# Altium PCB 解调板PCB.PcbDoc
Units mil, origin at the board's own origin, x right, y up, seen from the top; angles counter-clockwise.
Board outline 6000 x 4000 mil, 2 copper layers (Top Layer, Bottom Layer); 51 components, 40 nets, 150 pads, 1 vias.
Unrouted connection lines stored in the file: 1.
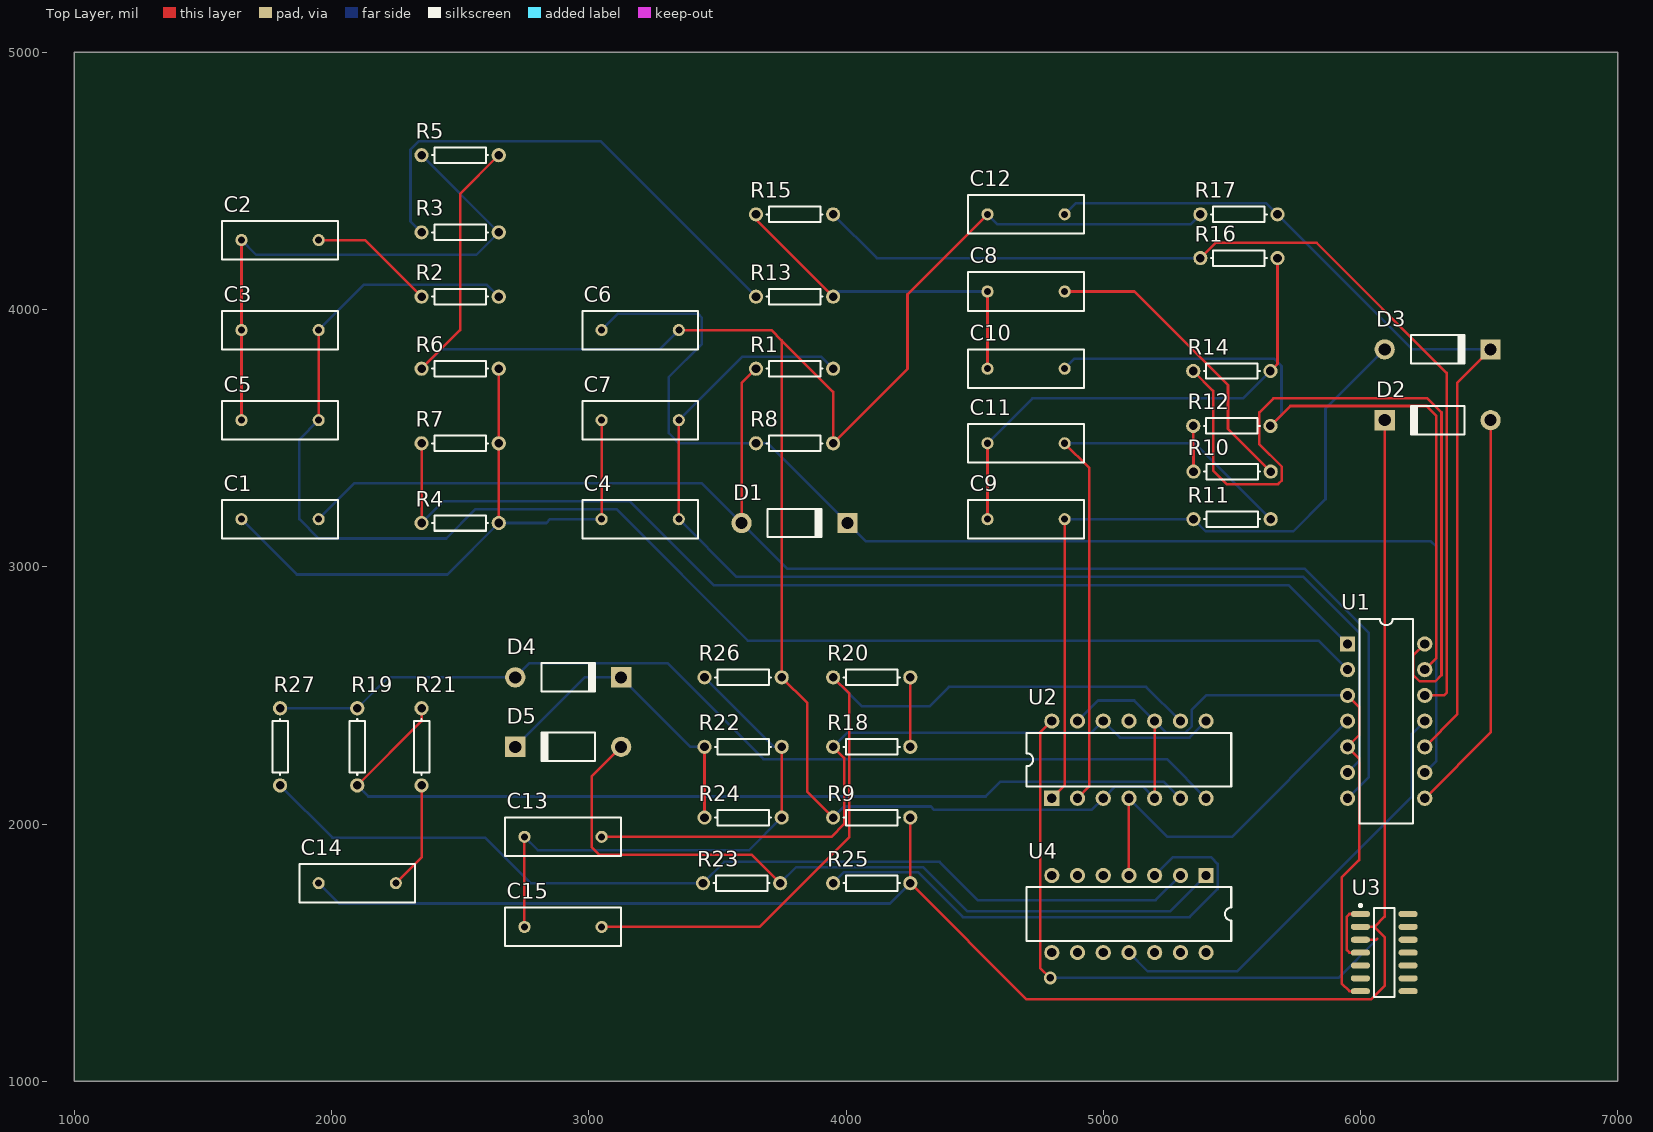
[diagram p0: Top Layer view]
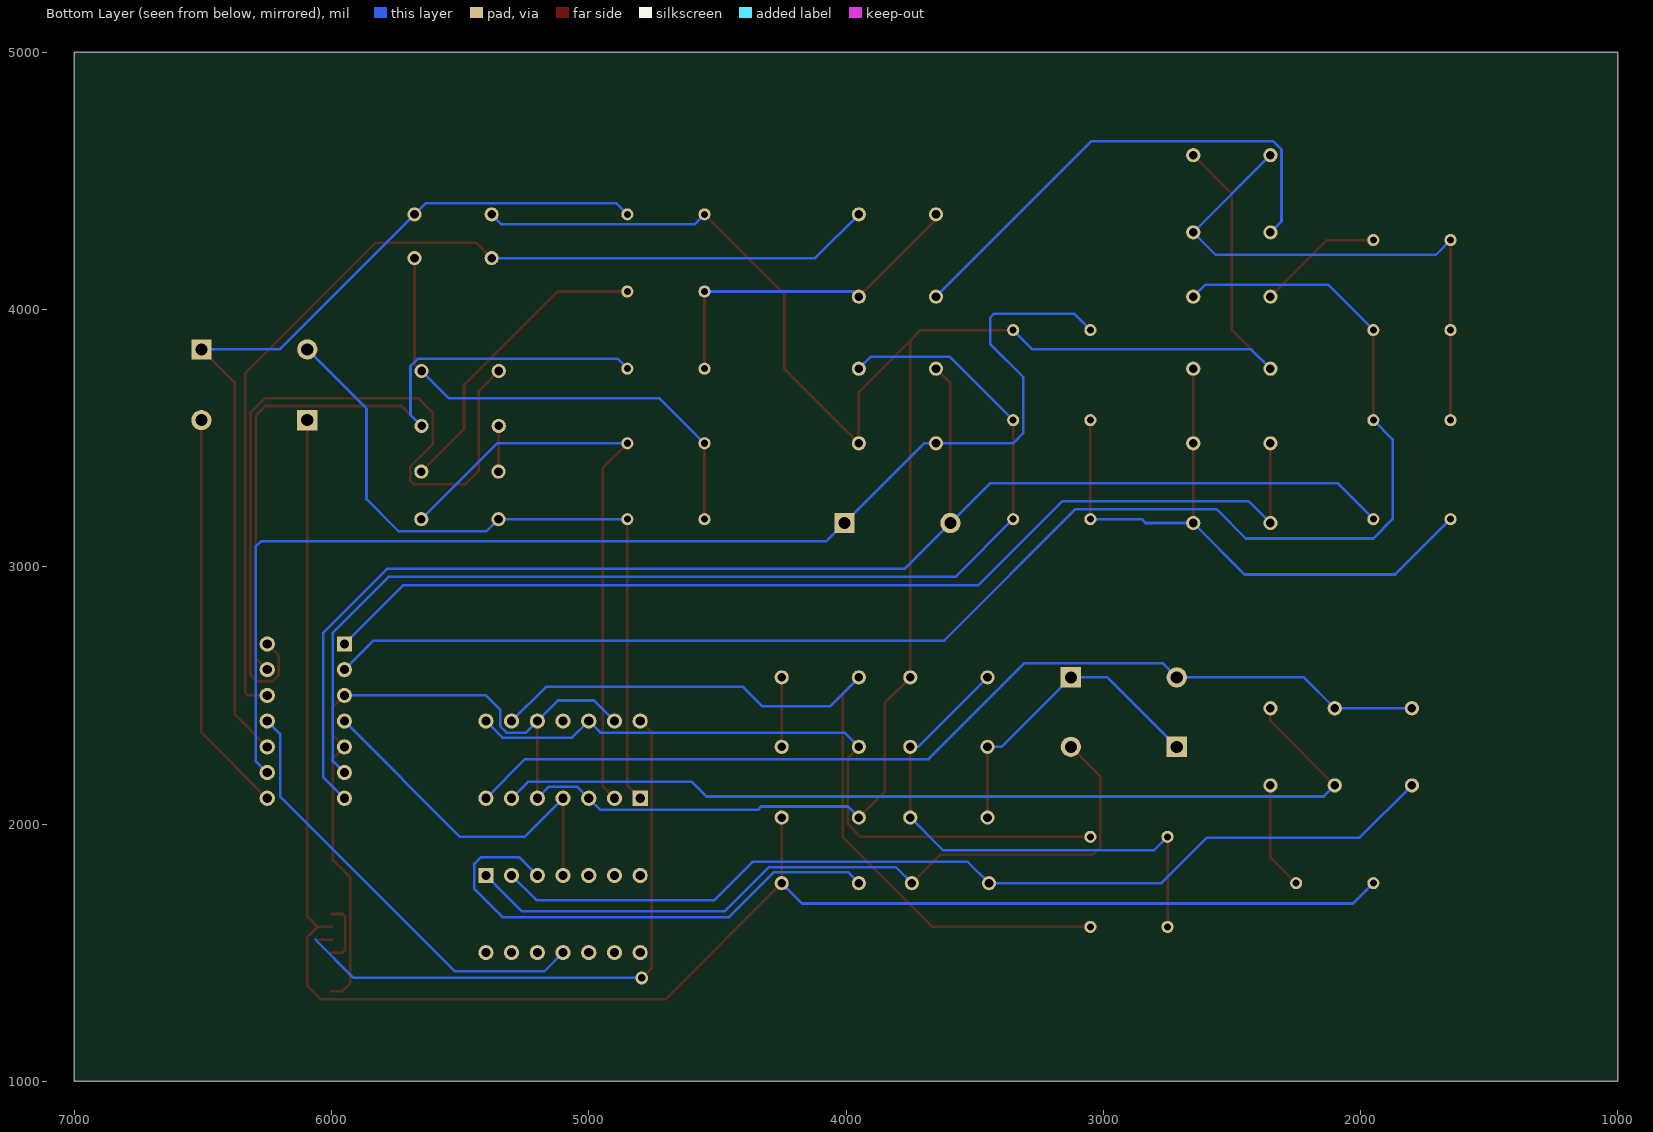
[diagram p1: Bottom Layer view, seen from below]

## Layer stack, top to bottom
Top Solder: solder mask 0.4, Solder Resist, Dk 3.5
Top Layer: signal copper 1.4
Dielectric 1: dielectric 12.6, FR-4, Dk 4.8
Bottom Layer: signal copper 1.4
Bottom Solder: solder mask 0.4, Solder Resist, Dk 3.5

## Board outline
1000,1000 7000,1000 7000,5000 1000,5000

## Design rules (kind name [scope] priority, off if disabled: settings)
Clearance [All] p1: gap=10 ignorepadtopadclearanceinfootprint=FALSE except(0: Arc-Hole Track-Hole SMDPad-Hole THPad-Hole Via-Hole Fill-Hole Poly-Hole Region-Hole Text-Hole)
PolygonConnect [All] p1: connectstyle=Relief reliefconductorwidth=10 reliefentries=4 polygonreliefangle="90 Angle" airgapwidth=10
RoomDefinition 解调板原理图 [InComponentClass('解调板原理图')] p1: confinementstyle=ConfineIn formatcopy=TRUE outline 7000,770 1050,770 1050,5070 7000,5070
RoutingVias [All] p1: holewidth=28 width=50 viastyle="Through Hole" minholewidth=28 minwidth=50 maxholewidth=28 maxwidth=50
SolderMaskExpansion [All] p1: expansion=4
Width [All] p1: maxlimit=10 minlimit=10 preferedwidth=10
30 further rules are at their usual default settings.

## Components (designator, comment, footprint, x,y, rotation, side; value= is the part's Value field where it differs from the comment)
C1 "Cap" RAD-0.3 1800,3185 r0 top value=150pF
C2 "Cap" RAD-0.3 1800,4270 r0 top value=150pF
C3 "Cap" RAD-0.3 1800,3920 r0 top value=100pF
C4 "Cap" RAD-0.3 3200,3185 r0 top value=100pF
C5 "Cap" RAD-0.3 1800,3570 r0 top value=20pF
C6 "Cap" RAD-0.3 3200,3920 r180 top value=10nF
C7 "Cap" RAD-0.3 3200,3570 r0 top value=20pF
C8 "Cap" RAD-0.3 4700,4070 r0 top value=100pF
C9 "Cap" RAD-0.3 4700,3185 r0 top value=100pF
C10 "Cap" RAD-0.3 4700,3770 r0 top value=100pF
C11 "Cap" RAD-0.3 4700,3480 r0 top value=100pF
C12 "Cap" RAD-0.3 4700,4370 r0 top value=10nF
C13 "Cap" RAD-0.3 2900,1950 r0 top value=150pF
C14 "Cap" RAD-0.3 2100,1770 r0 top value=10nF
C15 "Cap" RAD-0.3 2900,1600 r0 top value=100pF
D1 "Diode 1N4001" DO-41 3800,3170 r0 top
D2 "Diode 1N4001" DO-41 6300,3570 r180 top
D3 "Diode 1N4001" DO-41 6300,3845 r0 top
D4 "Diode 1N4001" DO-41 2920,2570 r0 top
D5 "Diode 1N4001" DO-41 2920,2300 r180 top
R1 "Res1" AXIAL-0.3 3800,3770 r180 top value=82K
R2 "Res1" AXIAL-0.3 2500,4050 r180 top value=120K
R3 "Res1" AXIAL-0.3 2500,4300 r0 top value=12K
R4 "Res1" AXIAL-0.3 2500,3170 r0 top value=100K
R5 "Res1" AXIAL-0.3 2500,4600 r180 top value=5.1K
R6 "Res1" AXIAL-0.3 2500,3770 r0 top value=3K
R7 "Res1" AXIAL-0.3 2500,3480 r0 top value=100K
R8 "Res1" AXIAL-0.3 3800,3480 r180 top value=1K
R9 "Res1" AXIAL-0.3 4100,2025 r0 top value=10K
R10 "Res1" AXIAL-0.3 5501,3370 r0 top value=100K
R11 "Res1" AXIAL-0.3 5501,3185 r180 top value=91K
R12 "Res1" AXIAL-0.3 5500,3547.52 r180 top value=15K
R13 "Res1" AXIAL-0.3 3800,4050 r0 top value=15K
R14 "Res1" AXIAL-0.3 5500,3761 r0 top value=47K
R15 "Res1" AXIAL-0.3 3800,4370 r180 top value=1.5K
R16 "Res1" AXIAL-0.3 5527.52,4200 r0 top value=1K
R17 "Res1" AXIAL-0.3 5527.52,4370 r0 top value=1K
R18 "Res1" AXIAL-0.3 4100,2300 r180 top value=180k
R19 "Res1" AXIAL-0.3 2100,2300 r90 top value=10K
R20 "Res1" AXIAL-0.3 4100,2570 r0 top value=180k
R21 "Res1" AXIAL-0.3 2350,2300 r90 top value=500
R22 "Res1" AXIAL-0.3 3600,2300 r0 top value=150k
R23 "Res1" AXIAL-0.3 3594.09,1770 r0 top value=10K
R24 "Res1" AXIAL-0.3 3600,2025 r0 top value=150k
R25 "Res1" AXIAL-0.3 4100,1770 r0 top value=500
R26 "Res1" AXIAL-0.3 3600,2570 r180 top value=220k
R27 "Res1" AXIAL-0.3 1800,2300 r270 top value=10K
U1 "TL084CN" DIP14 6100,2400 r270 top
U2 "TL084CN" DIP14 5100,2250 r0 top
U3 "SN74LS74AD" D014_L 6092.52,1500 r0 top
U4 "TL084CN" DIP14 5100,1650 r180 top

## Footprints (in the part's own frame and the unit in brackets; to place one, negate y for a bottom-side part, rotate by r counter-clockwise, add the part's x,y. Pads: shape width x height; smd on the part's side, far side on the other; paste and mask are expansions set on the pad)
AXIAL-0.3 [mm] "Axial Device, Thru-Hole; 2 Leads; 0.3 in Pin Spacing"
  round 1.4 hole 0.85: 1(-3.81,0) 2(3.81,0)
  silkscreen extent -2.77,-0.76 2.77,0.76
D014_L [mm] "SOIC, 14-Leads, Body 8.7x3.9mm, Pitch 1.27mm, IPC High Density"
  oval 1.9x0.6 smd: 1(-2.35,3.81) 2(-2.35,2.54) 3(-2.35,1.27) 4(-2.35,0) 5(-2.35,-1.27) 6(-2.35,-2.54) 7(-2.35,-3.81) 8(2.35,-3.81) 9(2.35,-2.54) 10(2.35,-1.27) 11(2.35,0) 12(2.35,1.27) 13(2.35,2.54) 14(2.35,3.81)
  silkscreen extent -2.47,-4.4 1,4.78, body extent -1.95,-4.33 1.95,4.33, height 1.75
DIP14 [mm] "DIP; 14 Leads; Row Spacing 7.62 mm; Pitch 2.54 mm"
  rect 1.5x1.5 hole 0.9: 1(-7.62,-3.81)
  round 1.5 hole 0.9: 2(-5.08,-3.81) 3(-2.54,-3.81) 4(0,-3.81) 5(2.54,-3.81) 6(5.08,-3.81) 7(7.62,-3.81) 8(7.62,3.81) 9(5.08,3.81) 10(2.54,3.81) 11(0,3.81) 12(-2.54,3.81) 13(-5.08,3.81) 14(-7.62,3.81)
  silkscreen extent -10.1,-2.65 10.1,2.65
DO-41 [mm] "Diode, Axial; Body 5.2 x 2.7 mm (LxDia. max), Lead Dia. 0.86 mm (max)"
  round 2 hole 1.2: 1(-5.23,0)
  rect 2x2 hole 1.2: 2(5.23,0)
  silkscreen extent -2.65,-1.4 2.75,1.4
RAD-0.3 [mm] "Radial Cap, Thru-Hole; 2 Leads; 0.3 in Pin Spacing"
  round 1.2 hole 0.7: 1(-3.81,0) 2(3.81,0)
  silkscreen extent -5.71,-1.91 5.71,1.91

## Part data
C1 C2 C3 C4 C5 C6 C7 C8 C9 C10 C11 C12 C13 C14 C15: "Capacitor", LatestRevisionDate=17-Jul-2002, LatestRevisionNote="Re-released for DXP Platform.", PackageDescription="Radial Cap, Thru-Hole; 2 Leads; 0.3 in Pin Spacing", PackageReference=RAD-0.3, Published=8-Jun-2000, Publisher="Altium Limited"
D1 D2 D3 D4 D5: "1 Amp General Purpose Rectifier", Code_JEDEC=DO-204-AL, ComponentLink1Description="Manufacturer Link", ComponentLink1URL=http://www.fairchildsemi.com/, ComponentLink2Description=Datasheet, ComponentLink2URL=http://www.fairchildsemi.com/ds/1N%2F1N4001.pdf, DatasheetVersion=1998, LatestRevisionDate=17-Jul-2002, LatestRevisionNote="Re-released for DXP Platform.", PackageDescription="Diode, Axial; Body 5.2 x 2.7 mm (LxDia. max), Lead Dia. 0.86 mm (max)", PackageReference=DO-41, PackageVersion=Aug-1999, Published=8-Jun-2000, Publisher="Altium Limited"
R1 R2 R3 R4 R5 R6 R7 R8 R9 R10 R11 R12 R13 R14 R15 R16 R17 R18 R19 R20 R21 R22 R23 R24 R25 R26 R27: "Resistor", LatestRevisionDate=17-Jul-2002, LatestRevisionNote="Re-released for DXP Platform.", PackageDescription="Axial Device, Thru-Hole; 2 Leads; 0.3 in Pin Spacing", PackageReference=AXIAL-0.3, Published=8-Jun-2000, Publisher="Altium Limited"
U1 U2 U4: "General-Purpose J-FET Quad Operational Amplifier", ComponentLink1Description="Manufacturer Link", ComponentLink1URL=http://www.st.com/, ComponentLink2Description=Datasheet, ComponentLink2URL=http://www.st.com/stonline/products/literature/ds/2301/tl084.pdf, DatasheetVersion=Jan-1999, LatestRevisionDate=06-Jun-2005, LatestRevisionNote="Stylized 3D Model Added.", PackageDescription="DIP; 14 Leads; Row Spacing 7.62 mm; Pitch 2.54 mm", PackageReference=DIP14, PackageVersion=Jan-1997, Published=24-Aug-2001, Publisher="Altium Limited"
U3: "Dual D-Type Positive-Edge-Triggered Flip-Flop with Preset and Clear", Code_IPC=SOIC127P600-14, ComponentLink1Description="Manufacturer Link", ComponentLink1URL=http://www.ti.com/, ComponentLink2Description=Datasheet, ComponentLink2URL=http://www-s.ti.com/sc/ds/sn74ls74a.pdf, DatasheetVersion=Mar-1988, LatestRevisionDate=13-Apr-2006, LatestRevisionNote="IPC-7351 Footprint Added.", PackageDescription="14-Pin Small Outline Integrated Circuit 1.27 mm Pitch", PackageReference=D014, PackageVersion=Jan-1998, Published=8-Jun-2000, Publisher="Altium Limited"

## Via types
v1: diameter 50, hole 28, Top Layer to Bottom Layer, 1 vias

## Nets (pads, with @x,y where several pads share a name; then routed paths per layer and width w, separated by ;. In a path a pad name is that pad's centre, name@x,y a point inside that pad or via, vN(x,y) a via of type N, cw(c..) or ccw(c..) an arc to the next point about the centre after c; other vN are vias at no path point)
5: U3.1 U3.4 | length 244.3
  Top Layer w10: U3.4 5957,1500 5947,1510 5947,1640 5957,1650 U3.1
12: U2.11
+12: U1.11 U4.11 | length 1725.6
  Bottom Layer w10: U4.11 5173,1427 5520,1427 6200,2107 6200,2350 U1.11
-12: U1.4 U2.4 U4.4 | length 1398.5
  Top Layer w10: U4.4 U2.4
  Bottom Layer w10: U2.4 5250,1950 5500,1950 U1.4
GND: C6.1 C12.1 R5.1 R6.1 R8.1 R9.1 R17.1 R26.1 U1.3 U1.5 U2.3 U2.5 U2.10 U2.13 U3.7 | length 11003
  Top Layer w10: R6.1 2500,3920 2500,4450 R5.1 ; C6.1 3710,3920 3750,3880 ; R9.1 3850,2125 3850,2470 R26.1 3750,3880 ; C12.1 4239,4059 4239,3769 R8.1 3950,3680 3750,3880 ; U2.5 U2.10 ; U1.3 5995,2455 5995,2345 U1.5 5995,2255 5995,1860 5927,1792 5927,1380 5957,1350 U3.7
  Bottom Layer w10: R6.1 2425,3845 3275,3845 C6.1 ; R9.1 3993,2068 4330,2068 4343,2055 4955,2055 U2.3 5045,2145 5155,2145 U2.5 ; C12.1 4589,4331 5338.52,4331 R17.1 ; U2.13 4980,2480 5120,2480 U2.10 5244.53,2355.47 5320,2355.47 5344.53,2380 5344.53,2444.53 5400,2500 U1.3
NetC1_1: C1.1 C4.1 C7.1 R4.2 R6.2 R7.2 | length 2563.1
  Top Layer w10: R4.2 R7.2 R6.2 ; C4.1 C7.1
  Bottom Layer w10: C1.1 1865,2970 2450,2970 R4.2 2835,3170 2850,3185 C4.1
NetC1_2: C1.2 D1.1 R1.2 U1.7 | length 5682.7
  Top Layer w10: D1.1 3594.09,3714.09 R1.2
  Bottom Layer w10: C1.2 2090,3325 3439.09,3325 D1.1 3771.09,2993 5783.12,2993 6033,2743.12 6033,2183 U1.7
NetC2_1: C2.1 C3.1 C5.1 R3.2 R5.2 | length 2183.9
  Top Layer w10: C5.1 C3.1 C2.1
  Bottom Layer w10: C2.1 1707,4213 2563,4213 R3.2 R5.2
NetC2_2: C2.2 R2.2 | length 491.1
  Top Layer w10: C2.2 2130,4270 R2.2
NetC3_2: C3.2 C5.2 R2.1 U1.2 | length 5970.6
  Top Layer w10: C5.2 C3.2
  Bottom Layer w10: C5.2 1875,3495 1875,3185 1950,3110 2446,3110 2560,3224 3107,3224 3618,2713 5837,2713 U1.2 ; C3.2 2127,4097 2603,4097 R2.1
NetC4_2: C4.2 C7.2 R1.1 U1.6 | length 4497.1
  Top Layer w10: C4.2 C7.2
  Bottom Layer w10: C4.2 3574,2961 5778.06,2961 5995,2744.06 5995,2245 U1.6 ; C7.2 3597,3817 3903,3817 R1.1
NetC6_2: C6.2 D1.2 R8.2 U1.9 | length 4988.3
  Bottom Layer w10: C6.2 3114,3984 3424,3984 3440,3968 3440,3866 3311,3737 3311,3520 3351,3480 R8.2 3695.91,3480 D1.2 4076.91,3099 6274,3099 6295,3078 6295,2245 U1.9
NetC8_1: C8.1 C10.1 R13.2 R15.2 | length 1352.5
  Top Layer w10: R15.2 3650,4350 R13.2 ; C10.1 C8.1
  Bottom Layer w10: R13.2 3970,4070 C8.1
NetC8_2: C8.2 R10.2 | length 1190.5
  Top Layer w10: C8.2 5121,4070 5485,3706 5485,3536 R10.2
NetC9_1: C9.1 C11.1 R14.2 R16.2 | length 1961.8
  Top Layer w10: C9.1 C11.1 ; R14.2 5677.52,3788.52 R16.2
  Bottom Layer w10: C11.1 4725,3655 5544,3655 R14.2
NetC9_2: C9.2 D3.1 R11.2 U2.1 | length 2868.3
  Top Layer w10: U2.1 4850,2150 C9.2
  Bottom Layer w10: C9.2 R11.2 5398,3138 5739,3138 5864,3263 5864,3614.91 D3.1
NetC10_2: C10.2 R12.1 U1.13 | length 2819.9
  Top Layer w10: R12.1 5727.48,3625 6257,3625 6295,3587 6295,2645 U1.13
  Bottom Layer w10: C10.2 4889,3809 5664,3809 5693,3780 5693,3590.52 R12.1
NetC11_2: C11.2 R11.1 U2.2 | length 2361.2
  Top Layer w10: C11.2 4945,3385 4945,2145 U2.2
  Bottom Layer w10: C11.2 5356,3480 R11.1
NetC12_2: C12.2 D3.2 R17.2 U1.10 | length 3560
  Top Layer w10: U1.10 6376,2426 6376,3715.09 D3.2
  Bottom Layer w10: C12.2 4893,4413 5634.52,4413 R17.2 6202.52,3845 D3.2
NetC13_1: C13.1 C15.1 R22.2 R24.2 R26.2 | length 2111
  Top Layer w10: C15.1 C13.1 ; R24.2 R22.2
  Bottom Layer w10: C13.1 2802,1898 3623,1898 R24.2 ; R26.2 3720,2300 R22.2
NetC13_2: C13.2 R18.2 U2.8 U2.12 | length 2826.4
  Top Layer w10: C13.2 3943,1950 3993,2000 3993,2257 R18.2
  Bottom Layer w10: R18.2 4005,2355 4955,2355 U2.12 5064.53,2335.47 5335.47,2335.47 U2.8
NetC14_1: C14.1 D2.2 R9.2 R25.2 U3.2 | length 6959.9
  Top Layer w10: R9.2 R25.2 4702,1318 6041,1318 6094.09,1371.09 6094.09,1560 6054.09,1600 ; U3.2 6054.09,1600 ; D2.2 6094.09,1640 6054.09,1600
  Bottom Layer w10: C14.1 2029,1691 4171,1691 R25.2
NetC14_2: C14.2 R21.1 | length 421.4
  Top Layer w10: C14.2 2350,1870 R21.1
NetC15_2: C15.2 R20.1 U2.9 | length 3238
  Top Layer w10: C15.2 3664,1600 4013,1949 4013,2507 R20.1
  Bottom Layer w10: R20.1 4063,2457 4324,2457 4400,2533 5167,2533 U2.9
NetD2_1: D2.1 U1.8 | length 1576
  Top Layer w10: U1.8 6505.91,2355.91 D2.1
NetD4_1: D4.1 R19.2 R27.1 U2.7 | length 3889.9
  Bottom Layer w10: R27.1 R19.2 2220,2570 D4.1 2769.09,2625 3306,2625 3679,2252 5248,2252 U2.7
NetD4_2: D4.2 D5.2 R22.1 R24.1 | length 1234.6
  Top Layer w10: R24.1 R22.1
  Bottom Layer w10: D5.2 2984.09,2570 D4.2 3395.91,2300 R22.1
NetD5_1: D5.1 R23.2 U4.1 | length 3040
  Top Layer w10: D5.1 3011,2185.09 3011,1910 3040,1881 3633.09,1881 R23.2
  Bottom Layer w10: R23.2 3806.65,1832.56 4300,1832.56 4472.56,1660 5260,1660 U4.1
NetR3_1: R3.1 R13.1 | length 1947.1
  Bottom Layer w10: R3.1 2307,4343 2307,4622 2340,4655 3045,4655 R13.1
NetR4_1: R4.1 R7.1 U1.1 | length 4175.1
  Top Layer w10: R4.1 R7.1
  Bottom Layer w10: R4.1 2435,3255 3159,3255 3486,2928 5722,2928 U1.1
NetR10_1: R10.1 R12.2 | length 177.9
  Top Layer w10: R12.2 5350,3459 5351,3458 R10.1
NetR14_1: R14.1 U1.14 | length 3058.2
  Top Layer w10: R14.1 5427,3684 5427,3374 5480,3321 5680,3321 5694,3335 5694,3389 5607,3476 5607,3600 5662,3655 6260,3655 6315,3600 6315,2579 6291,2555 6230,2555 6205,2580 6205,2655 U1.14
NetR15_1: R15.1 R16.1 U1.12 | length 4022.2
  Top Layer w10: R16.1 5436.52,4259 5830,4259 6335,3754 6335,2510 6325,2500 U1.12
  Bottom Layer w10: R15.1 4120,4200 R16.1
NetR18_1: R18.1 R20.2 | length 270
  Top Layer w10: R18.1 R20.2
NetR19_1: R19.1 R21.2 U2.6 | length 3672.3
  Top Layer w10: R19.1 2350,2400 R21.2
  Bottom Layer w10: R19.1 2143,2107 4543,2107 4601,2165 5235,2165 U2.6
NetR23_1: R23.1 R27.2 U4.2 | length 3792.9
  Bottom Layer w10: R27.2 2003,1947 2597,1947 2774,1770 R23.1 3526.65,1852.56 4363.44,1852.56 4512,1704 5204,1704 U4.2
NetR25_1: R25.1 U4.3 | length 2012.4
  Bottom Layer w10: R25.1 3992.56,1812.56 4280,1812.56 4454.56,1638 5336,1638 5445,1747 5445,1845 5420,1870 5270,1870 U4.3
NetU2_14: U2.14 U3.3 | length 2429.8
  Top Layer w10: v1(4794,1402) 4755,1441 4755,2355 U2.14 ; U3.3 6062,1550 6066,1554
  Bottom Layer w10: v1(4794,1402) 5914,1402 6062,1550
NetU3_5: U3.5
VCC: U3.14
pads on no net: U3.6 U3.8 U3.9 U3.10 U3.11 U3.12 U3.13 U4.5 U4.6 U4.7 U4.8 U4.9 U4.10 U4.12 U4.13 U4.14